# Altium PCB Mickeyboard.PcbDoc
Units mil, origin at the board's own origin, x right, y up, seen from the top; angles counter-clockwise.
Board outline 7195 x 5915 mil, 2 copper layers (Top Layer, Bottom Layer); 44 components, 41 nets, 252 pads, 0 vias.
Unrouted connection lines stored in the file: 15.
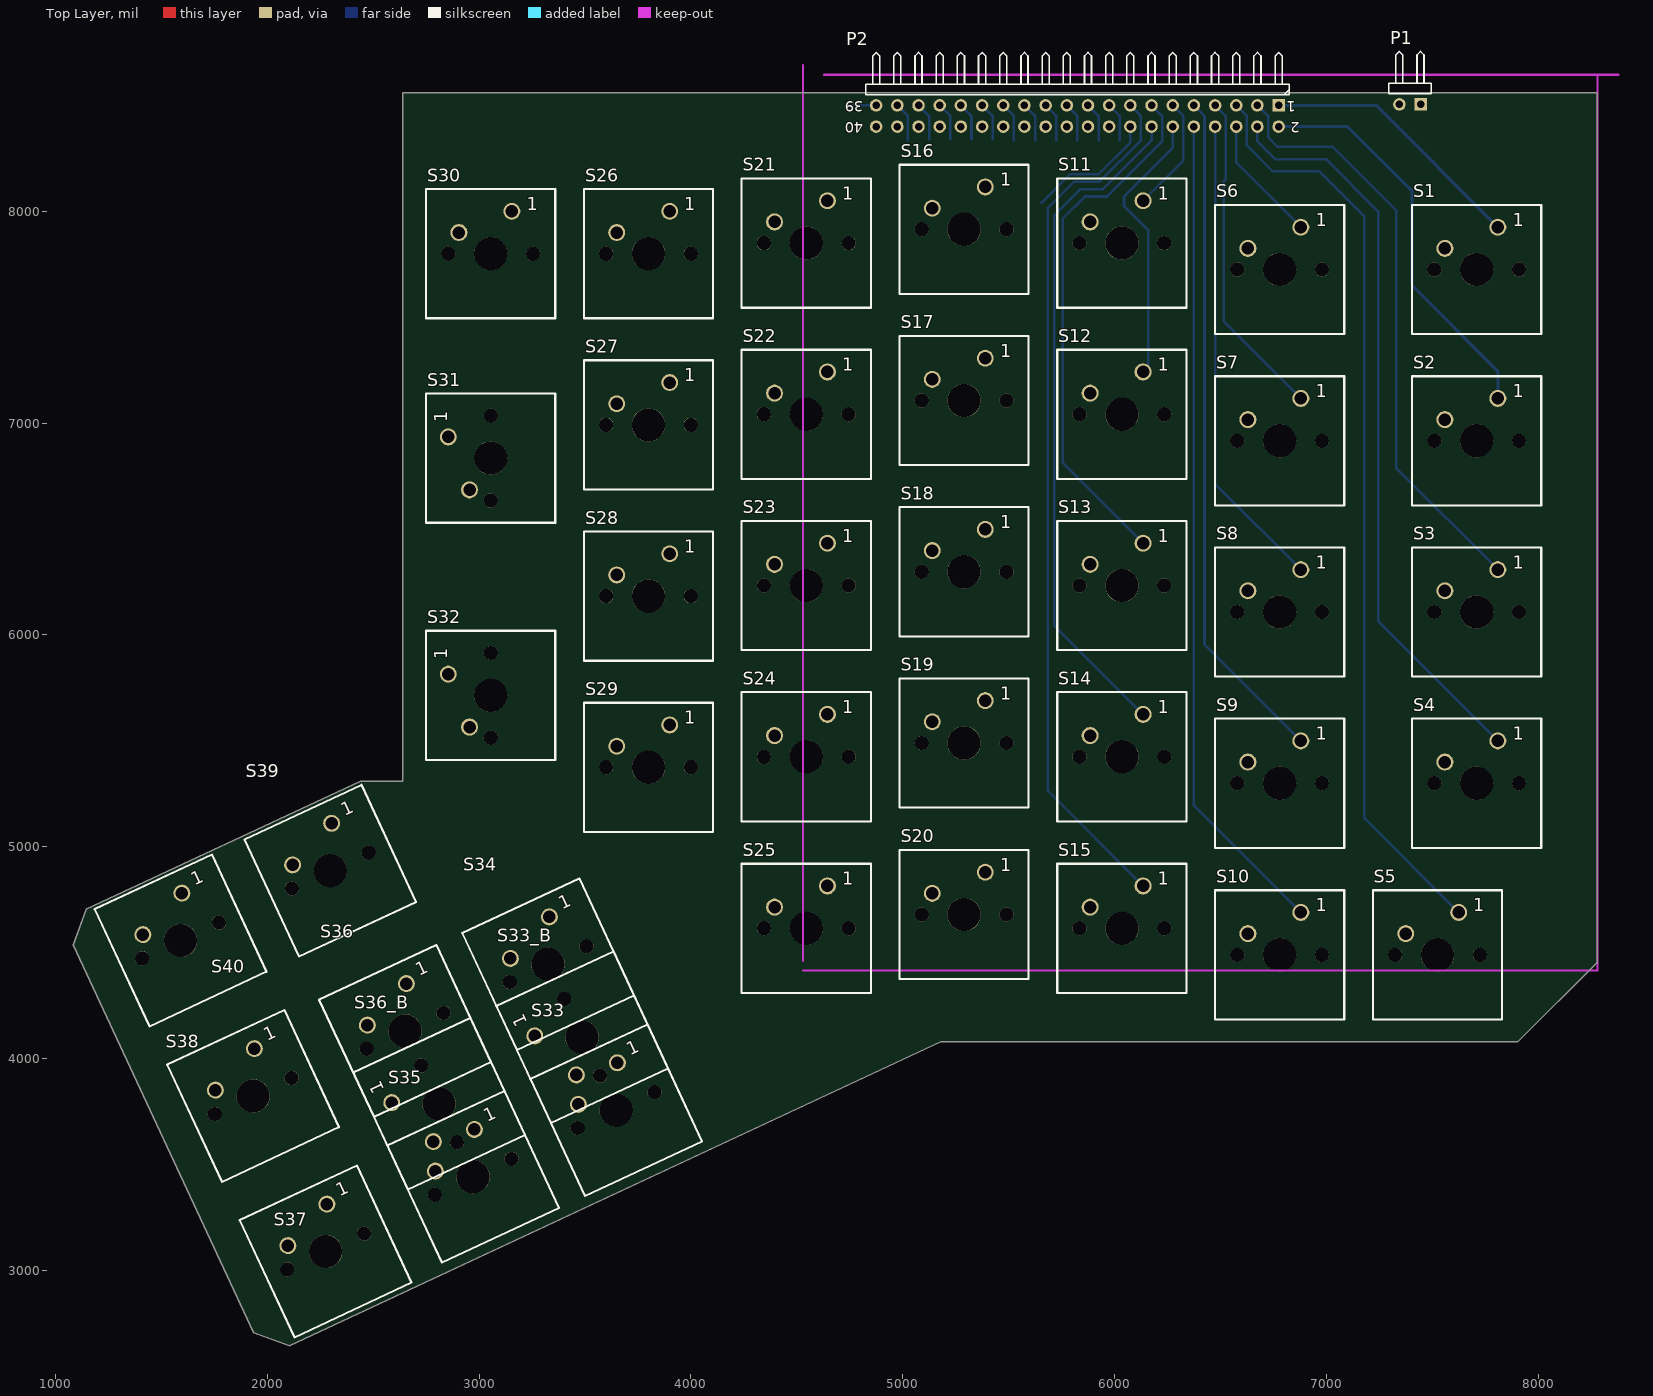
[diagram p0: Top Layer view]
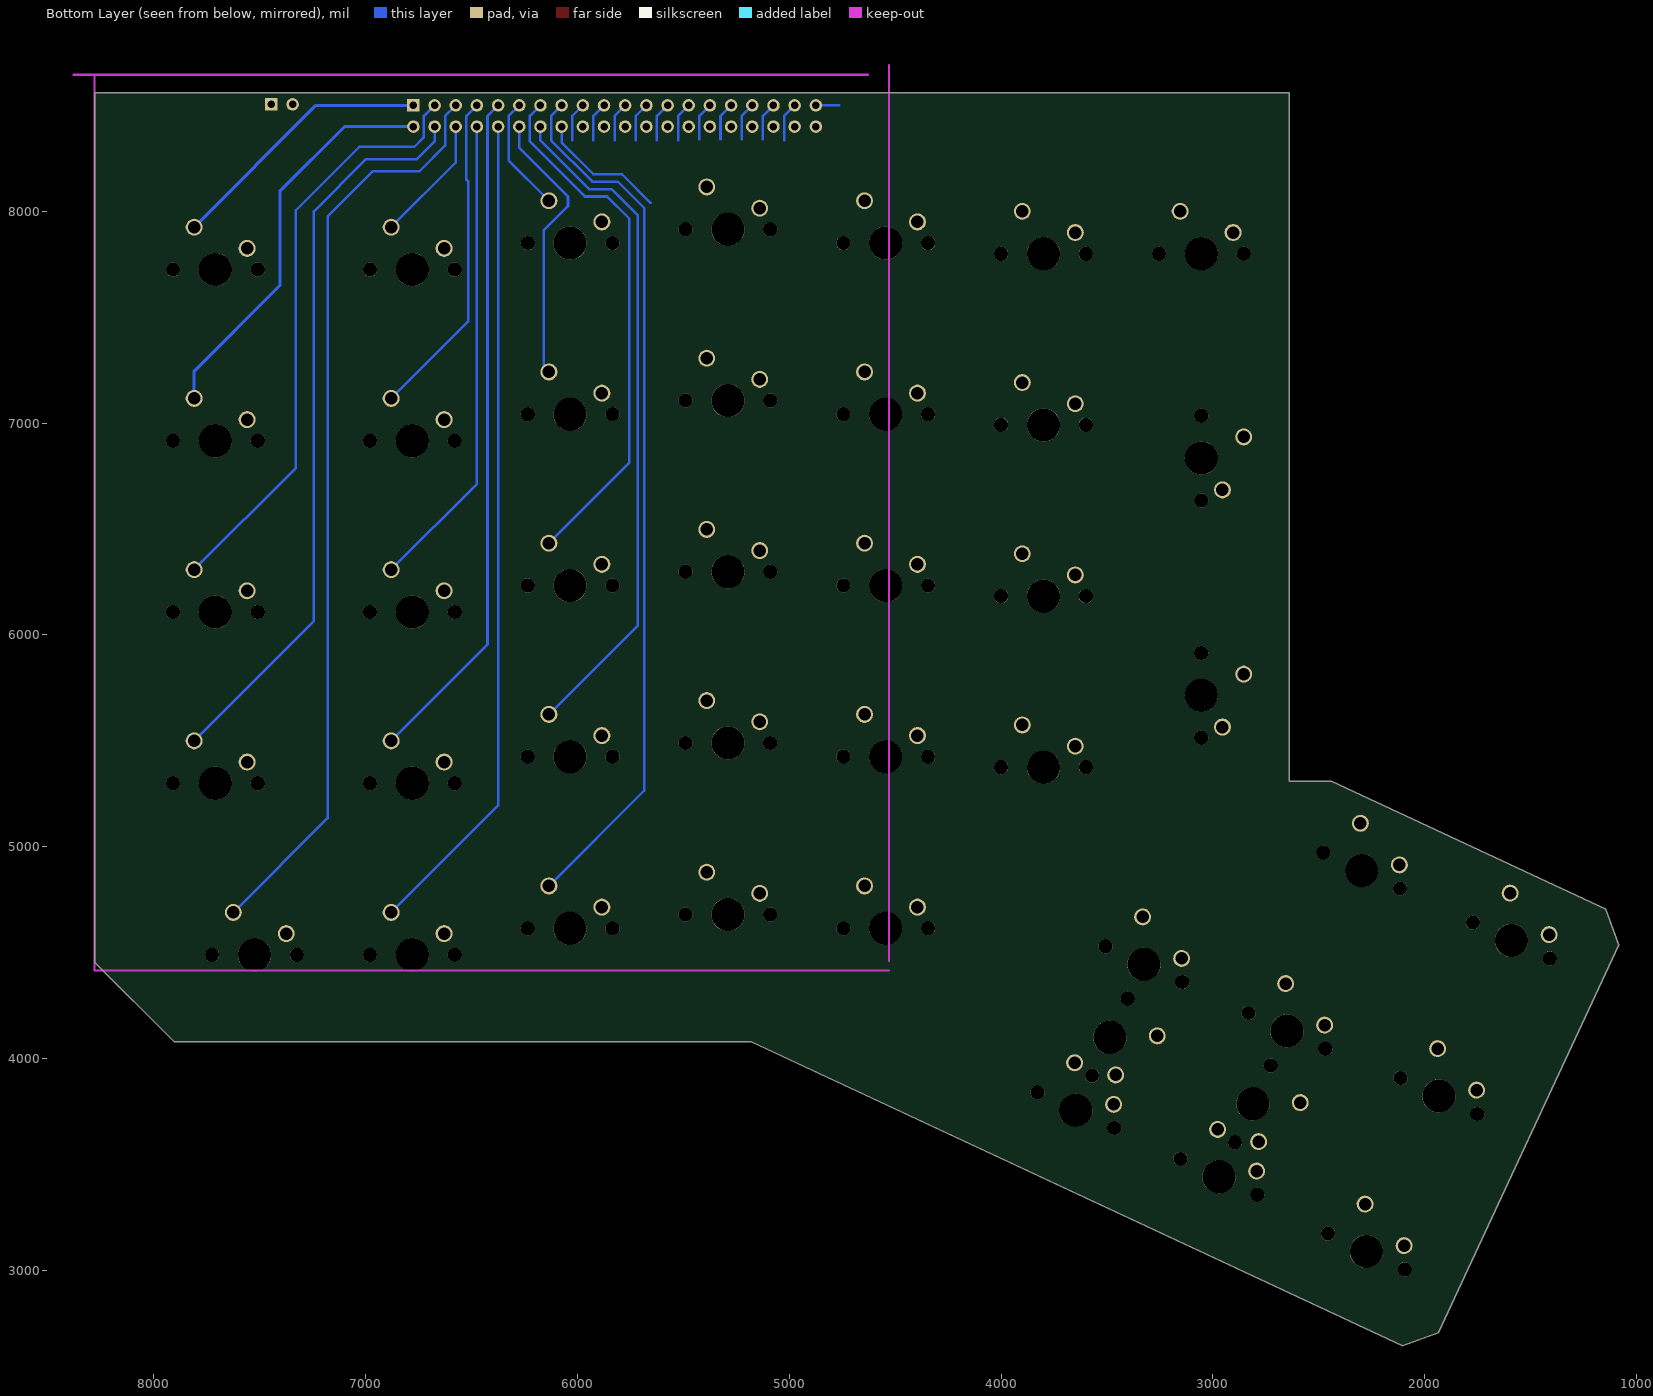
[diagram p1: Bottom Layer view, seen from below]

## Layer stack, top to bottom
Top Solder: solder mask 0.4, Solder Resist, Dk 3.5
Top Layer: signal copper 1.4
Dielectric 1: dielectric 12.6, FR-4, Dk 4.8
Bottom Layer: signal copper 1.4
Bottom Solder: solder mask 0.4, Solder Resist, Dk 3.5

## Board outline
2440.3,5310 1145,4705 1085,4535.93 1936.52,2705 2105,2645 5180,4080 7905,4080 8280,4455 8280,8560 2640,8560 2640,5310

## Design rules (kind name [scope] priority, off if disabled: settings)
Clearance [All] p1: gap=13
PolygonConnect [All] p1: connectstyle=Relief reliefconductorwidth=10 reliefentries=4 polygonreliefangle="90 Angle" airgapwidth=10
RoomDefinition keyboard [InComponentClass('keyboard')] p1: confinementstyle=ConfineIn formatcopy=TRUE lockcomponents=FALSE outline 9000,6100 36460,6100 36460,8375 9000,8375
RoutingVias [All] p1: holewidth=32 width=62 viastyle="Through Hole" minholewidth=28 minwidth=50 maxholewidth=28 maxwidth=50
SolderMaskExpansion [All] p1: expansion=4
Width [All] p1: maxlimit=20 minlimit=12 preferedwidth=15
30 further rules are at their usual default settings.

## Components (designator, comment, footprint, x,y, rotation, side; value= is the part's Value field where it differs from the comment)
P1 "Header 2H" HDR1X2H 7445,8505 r180 top
P2 "Header 20X2H" HDR2X20H 6775,8500 r180 top
S1 "SW-SPST" CHERRYMXSWITCHNOLED 7710,7725 r0 top
S2 "SW-SPST" CHERRYMXSWITCHNOLED 7710,6916.67 r0 top
S3 "SW-SPST" CHERRYMXSWITCHNOLED 7710,6108.33 r0 top
S4 "SW-SPST" CHERRYMXSWITCHNOLED 7710,5300 r0 top
S5 "SW-SPST" CHERRYMXSWITCHNOLED 7525,4490 r0 top locked
S6 "SW-SPST" CHERRYMXSWITCHNOLED 6780,7725 r0 top
S7 "SW-SPST" CHERRYMXSWITCHNOLED 6780,6916.67 r0 top
S8 "SW-SPST" CHERRYMXSWITCHNOLED 6780,6108.33 r0 top
S9 "SW-SPST" CHERRYMXSWITCHNOLED 6780,5300 r0 top
S10 "SW-SPST" CHERRYMXSWITCHNOLED 6780,4490 r0 top
S11 "SW-SPST" CHERRYMXSWITCHNOLED 6035,7850 r0 top
S12 "SW-SPST" CHERRYMXSWITCHNOLED 6035,7041.67 r0 top
S13 "SW-SPST" CHERRYMXSWITCHNOLED 6035,6233.33 r0 top
S14 "SW-SPST" CHERRYMXSWITCHNOLED 6035,5425 r0 top
S15 "SW-SPST" CHERRYMXSWITCHNOLED 6035,4615 r0 top
S16 "SW-SPST" CHERRYMXSWITCHNOLED 5290,7915 r0 top
S17 "SW-SPST" CHERRYMXSWITCHNOLED 5290,7106.67 r0 top
S18 "SW-SPST" CHERRYMXSWITCHNOLED 5290,6298.33 r0 top
S19 "SW-SPST" CHERRYMXSWITCHNOLED 5290,5490 r0 top
S20 "SW-SPST" CHERRYMXSWITCHNOLED 5290,4680 r0 top
S21 "SW-SPST" CHERRYMXSWITCHNOLED 4545,7850 r0 top
S22 "SW-SPST" CHERRYMXSWITCHNOLED 4545,7041.67 r0 top
S23 "SW-SPST" CHERRYMXSWITCHNOLED 4545,6233.33 r0 top
S24 "SW-SPST" CHERRYMXSWITCHNOLED 4545,5425 r0 top
S25 "SW-SPST" CHERRYMXSWITCHNOLED 4545,4615 r0 top
S26 "SW-SPST" CHERRYMXSWITCHNOLED 3800,7800 r0 top
S27 "SW-SPST" CHERRYMXSWITCHNOLED 3800,6991.67 r0 top
S28 "SW-SPST" CHERRYMXSWITCHNOLED 3800,6183.33 r0 top
S29 "SW-SPST" CHERRYMXSWITCHNOLED 3800,5375 r0 top
S30 "SW-SPST" CHERRYMXSWITCHNOLED 3055,7800 r0 top locked
S31 "SW-SPST" CHERRYMXSWITCHNOLED 3055,6835 r90 top locked
S32 "SW-SPST" CHERRYMXSWITCHNOLED 3055,5715 r90 top locked
S33 "SW-SPST" CHERRYMXSWITCHNOLED 3647.22,3756.62 r25 top
S33_B "SW-SPST" CHERRYMXSWITCHNOLED 3486.63,4101.02 r115 top
S34 "SW-SPST" CHERRYMXSWITCHNOLED 3326.03,4445.42 r25 top
S35 "SW-SPST" CHERRYMXSWITCHNOLED 2972.02,3441.77 r25 top
S36 "SW-SPST" CHERRYMXSWITCHNOLED 2650.83,4130.57 r25 top
S36_B "SW-SPST" CHERRYMXSWITCHNOLED 2811.43,3786.17 r115 top
S37 "SW-SPST" CHERRYMXSWITCHNOLED 2275.67,3089.47 r25 top
S38 "SW-SPST" CHERRYMXSWITCHNOLED 1933.35,3823.58 r25 top
S39 "SW-SPST" CHERRYMXSWITCHNOLED 2297.95,4887.34 r25 top
S40 "SW-SPST" CHERRYMXSWITCHNOLED 1591.03,4557.69 r25 top

## Footprints (in the part's own frame and the unit in brackets; to place one, negate y for a bottom-side part, rotate by r counter-clockwise, add the part's x,y. Pads: shape width x height; smd on the part's side, far side on the other; paste and mask are expansions set on the pad)
CHERRYMXSWITCHNOLED [mil] "Cherry Mx Switch  NO LED"
  round 80 hole 59: 1(100,200) 2(-150,100)
  round 67 hole 67: ""(-200,0) ""(200,0)
  round 157 hole 157 unplated: ""(0,0)
  silkscreen extent -305,-305 305,305
HDR1X2H [mm] "Connector; Header; 2 Position; Right Angle"
  rect 1.5x1.5 hole 0.9: 1(0,0)
  round 1.5 hole 0.9: 2(2.54,0)
  silkscreen extent -1.27,-6.35 3.81,-1.27
HDR2X20H [mm] "Connector; Header; 20x2 Position; Right Angle"
  rect 1.5x1.5 hole 0.9: 1(0,0)
  round 1.5 hole 0.9: 2(0,2.54) 3(2.54,0) 4(2.54,2.54) 5(5.08,0) 6(5.08,2.54) 7(7.62,0) 8(7.62,2.54) 9(10.16,0) 10(10.16,2.54) 11(12.7,0) 12(12.7,2.54) 13(15.24,0) 14(15.24,2.54) 15(17.78,0) 16(17.78,2.54) 17(20.32,0) 18(20.32,2.54) 19(22.86,0) 20(22.86,2.54) 21(25.4,0) 22(25.4,2.54) 23(27.94,0) 24(27.94,2.54) 25(30.48,0) 26(30.48,2.54) 27(33.02,0) 28(33.02,2.54) 29(35.56,0) 30(35.56,2.54) 31(38.1,0) 32(38.1,2.54) 33(40.64,0) 34(40.64,2.54) 35(43.18,0) 36(43.18,2.54) 37(45.72,0) 38(45.72,2.54) 39(48.26,0) 40(48.26,2.54)
  silkscreen extent -1.27,-6.35 49.53,-1.27

## Part data
P1: "Header, 2-Pin, Right Angle"
P2: "Header, 20-Pin, Dual row, Right Angle"
S1 S2 S3 S4 S5 S6 S7 S8 S9 S10 S11 S12 S13 S14 S15 S16 S17 S18 S19 S20 S21 S22 S23 S24 S25 S26 S27 S28 S29 S30 S31 S32 S33 S33_B S34 S35 S36 S36_B S37 S38 S39 S40: "Single-Pole, Single-Throw Switch"

## Nets (pads, with @x,y where several pads share a name; then routed paths per layer and width w, separated by ;. In a path a pad name is that pad's centre, name@x,y a point inside that pad or via, vN(x,y) a via of type N, cw(c..) or ccw(c..) an arc to the next point about the centre after c; other vN are vias at no path point)
GND: P1.1 P1.2 S1.2 S2.2 S3.2 S4.2 S5.2 S6.2 S7.2 S8.2 S9.2 S10.2 S11.2 S12.2 S13.2 S14.2 S15.2 S16.2 S17.2 S18.2 S19.2 S20.2 S21.2 S22.2 S23.2 S24.2 S25.2 S26.2 S27.2 S28.2 S29.2 S30.2 S31.2 S32.2 S33.2 S33_B.2 S34.2 S35.2 S36.2 S36_B.2 S37.2 S38.2 S39.2 S40.2
KEY0: P2.1 S1.1 | length 1273.2
  Bottom Layer w15: P2.1 7235,8500 S1.1
KEY1: P2.2 S2.1 | length 1902.4
  Bottom Layer w15: P2.2 7100,8400 7405,8095 7405,7650 7810,7245 S2.1
KEY2: P2.3 S3.1 | length 2814.1
  Bottom Layer w12: P2.3 6725,8450 6725,8350 6770,8305 7030,8305 7330,8005 7330,6788.33 S3.1
KEY3: P2.4 S4.1 | length 3510.7
  Bottom Layer w12: P2.4 6675,8330 6760,8245 7000,8245 7245,8000 7245,6065 S4.1
KEY4: P2.5 S5.1 | length 4373.8
  Bottom Layer w12: P2.5 6625,8450 6625,8310 6745,8190 6965,8190 7180,7975 7180,5135 S5.1
KEY5: P2.6 S6.1 | length 601.3
  Bottom Layer w12: P2.6 6575,8230 S6.1
KEY6: P2.7 S7.1 | length 1559.4
  Bottom Layer w12: P2.7 6525,8450 6525,8150 6515,8140 6515,7481.67 S7.1
KEY7: P2.8 S8.1 | length 2259.4
  Bottom Layer w12: P2.8 6475,6713.33 S8.1
KEY8: P2.9 S9.1 | length 3209.2
  Bottom Layer w12: P2.9 6425,8450 6425,5955 S9.1
KEY9: P2.10 S10.1 | length 3919.2
  Bottom Layer w12: P2.10 6375,5195 S10.1
KEY10: P2.11 S11.1 | length 549.4
  Bottom Layer w12: S11.1 6325,8240 6325,8450 P2.11
KEY11: P2.12 S12.1 | length 1311.6
  Bottom Layer w12: S12.1 6160,7266.67 6160,7910 6045,8025 6045,8070 6275,8300 P2.12
KEY12: P2.13 S13.1 | length 2501
  Bottom Layer w12: S13.1 5755,6813.33 5755,7965 5860,8070 5965,8070 6225,8330 6225,8450 P2.13
KEY13: P2.14 S14.1 | length 3201
  Bottom Layer w12: S14.1 5715,6045 5715,7980 5840,8105 5945,8105 6175,8335 P2.14
KEY14: P2.15 S15.1 | length 4144.7
  Bottom Layer w12: P2.15 6125,8450 6125,8335 5930,8140 5810,8140 5685,8015 5685,5265 S15.1
KEY15: P2.16 S16.1 | length 613.1
  Bottom Layer w12: 5655,8040 5790,8175 5925,8175 6075,8325 P2.16
KEY16: P2.17 S17.1 | length 185.7
  Bottom Layer w12: P2.17 6025,8450 6025,8335
KEY17: P2.18 S18.1
KEY18: P2.19 S19.1 | length 185.7
  Bottom Layer w12: P2.19 5925,8450 5925,8335
KEY19: P2.20 S20.1
KEY20: P2.21 S21.1 | length 185.7
  Bottom Layer w12: P2.21 5825,8450 5825,8335
KEY21: P2.22 S22.1
KEY22: P2.23 S23.1 | length 185.7
  Bottom Layer w12: P2.23 5725,8450 5725,8335
KEY23: P2.24 S24.1
KEY24: P2.25 S25.1 | length 185.7
  Bottom Layer w12: P2.25 5625,8450 5625,8335
KEY25: P2.26 S26.1
KEY26: P2.27 S27.1 | length 185.7
  Bottom Layer w12: P2.27 5525,8450 5525,8335
KEY27: P2.28 S28.1
KEY28: P2.29 S29.1 | length 180.7
  Bottom Layer w12: P2.29 5425,8450 5425,8340
KEY29: P2.30 S30.1
KEY30: P2.31 S31.1 | length 180.7
  Bottom Layer w12: P2.31 5325,8450 5325,8340
KEY31: P2.32 S32.1
KEY32: P2.33 S33.1 | length 180.7
  Bottom Layer w12: P2.33 5225,8450 5225,8340
KEY33: P2.34 S33_B.1 S34.1
KEY34: P2.35 S35.1 | length 180.7
  Bottom Layer w12: P2.35 5125,8450 5125,8340
KEY35: P2.36 S36.1 S36_B.1
KEY36: P2.37 S37.1 | length 185.7
  Bottom Layer w12: P2.37 5025,8450 5025,8335
KEY37: P2.38 S38.1
KEY38: P2.39 S39.1 | length 110
  Bottom Layer w12: 4765,8500 P2.39
KEY39: P2.40 S40.1
pads on no net: S1. S2. S3. S4. S5. S6. S7. S8. S9. S10. S11. S12. S13. S14. S15. S16. S17. S18. S19. S20. S21. S22. S23. S24. S25. S26. S27. S28. S29. S30. S31. S32. S33. S33_B. S34. S35. S36. S36_B. S37. S38. S39. S40.

## Keep-outs
Keep-Out Layer:
  lines w10: 4530,4415 8280,4415 8280,8645 ; 4530,4460 4530,8690 ; 4630,8645 8380,8645

## Silkscreen, mask and mechanical layers (free items; w line width, h text height)
Drill Drawing:
  text ".LEGEND" at 11525,4015 h60
  text "Drill Drawing." at 11640,3860 h60

## Dimensions
5180,4385 to 8280,4400 on Mechanical 1
8280,8645 to 2640,8340 on Mechanical 1

## Text inside footprints (layer, text, board x,y; h text height)
P2: Top Overlay "2" at 6875,8420 h50 r180; Top Overlay "1" at 6855,8520 h50 r180; Top Overlay "39" at 4815,8520 h50 r180; Top Overlay "40" at 4815,8420 h50 r180
S1: Top Overlay "1" at 7880,7930 h60
S2: Top Overlay "1" at 7880,7121.67 h60
S3: Top Overlay "1" at 7880,6313.33 h60
S4: Top Overlay "1" at 7880,5505 h60
S5: Top Overlay "1" at 7695,4695 h60
S6: Top Overlay "1" at 6950,7930 h60
S7: Top Overlay "1" at 6950,7121.67 h60
S8: Top Overlay "1" at 6950,6313.33 h60
S9: Top Overlay "1" at 6950,5505 h60
S10: Top Overlay "1" at 6950,4695 h60
S11: Top Overlay "1" at 6205,8055 h60
S12: Top Overlay "1" at 6205,7246.67 h60
S13: Top Overlay "1" at 6205,6438.33 h60
S14: Top Overlay "1" at 6205,5630 h60
S15: Top Overlay "1" at 6205,4820 h60
S16: Top Overlay "1" at 5460,8120 h60
S17: Top Overlay "1" at 5460,7311.67 h60
S18: Top Overlay "1" at 5460,6503.33 h60
S19: Top Overlay "1" at 5460,5695 h60
S20: Top Overlay "1" at 5460,4885 h60
S21: Top Overlay "1" at 4715,8055 h60
S22: Top Overlay "1" at 4715,7246.67 h60
S23: Top Overlay "1" at 4715,6438.33 h60
S24: Top Overlay "1" at 4715,5630 h60
S25: Top Overlay "1" at 4715,4820 h60
S26: Top Overlay "1" at 3970,8005 h60
S27: Top Overlay "1" at 3970,7196.67 h60
S28: Top Overlay "1" at 3970,6388.33 h60
S29: Top Overlay "1" at 3970,5580 h60
S30: Top Overlay "1" at 3225,8005 h60
S31: Top Overlay "1" at 2850,7005 h60 r90
S32: Top Overlay "1" at 2850,5885 h60 r90
S33: Top Overlay "1" at 3714.66,4014.26 h60 r25
S33_B: Top Overlay "1" at 3228.99,4168.46 h60 r115
S34: Top Overlay "1" at 3393.47,4703.06 h60 r25
S35: Top Overlay "1" at 3039.46,3699.41 h60 r25
S36: Top Overlay "1" at 2718.27,4388.21 h60 r25
S36_B: Top Overlay "1" at 2553.79,3853.61 h60 r115
S37: Top Overlay "1" at 2343.1,3347.11 h60 r25
S38: Top Overlay "1" at 2000.78,4081.22 h60 r25
S39: Top Overlay "1" at 2365.38,5144.97 h60 r25
S40: Top Overlay "1" at 1658.46,4815.33 h60 r25